# Altium PCB PCB1.PcbDoc
Units mil, origin at the board's own origin, x right, y up, seen from the top; angles counter-clockwise.
Board outline 1140.51 x 1430.51 mil, 2 copper layers (Top Layer, Bottom Layer); 20 components, 9 nets, 52 pads, 1 vias.
Unrouted connection lines stored in the file: 1.
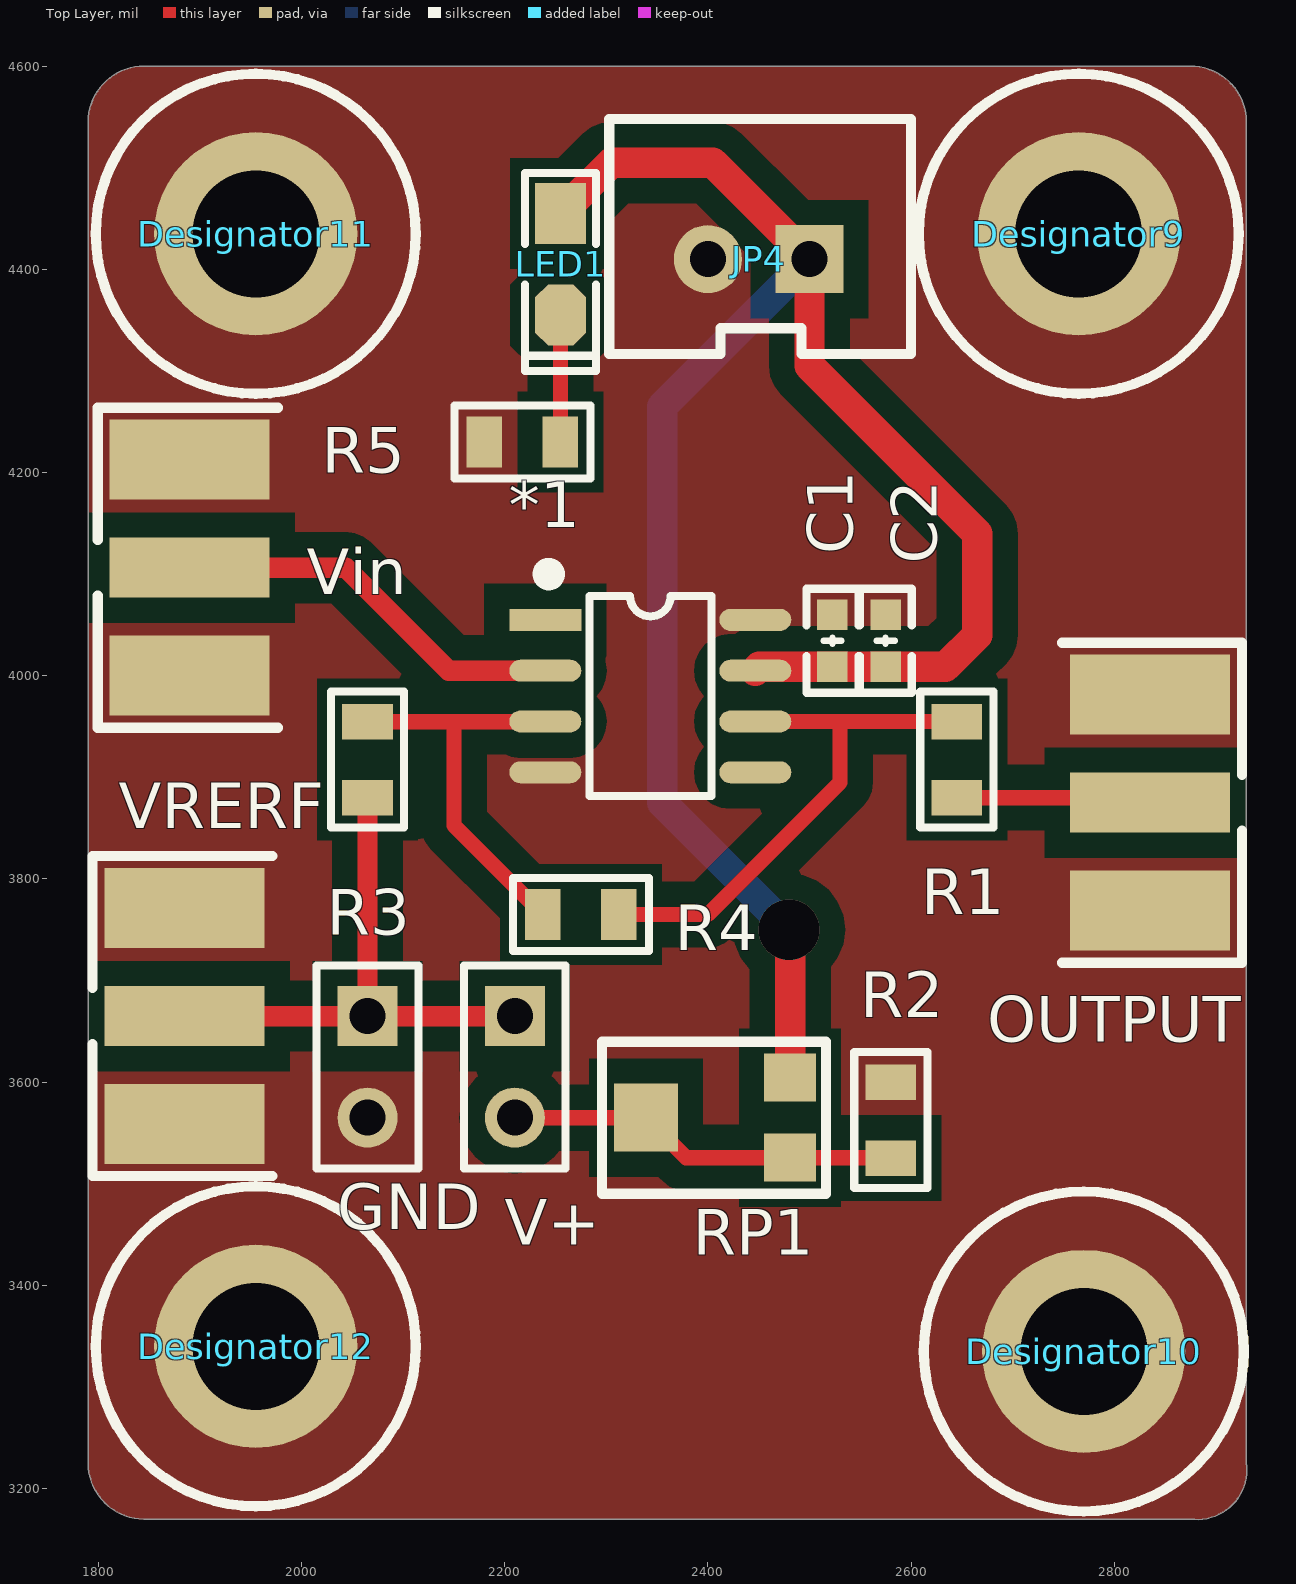
[diagram p0: Top Layer view]
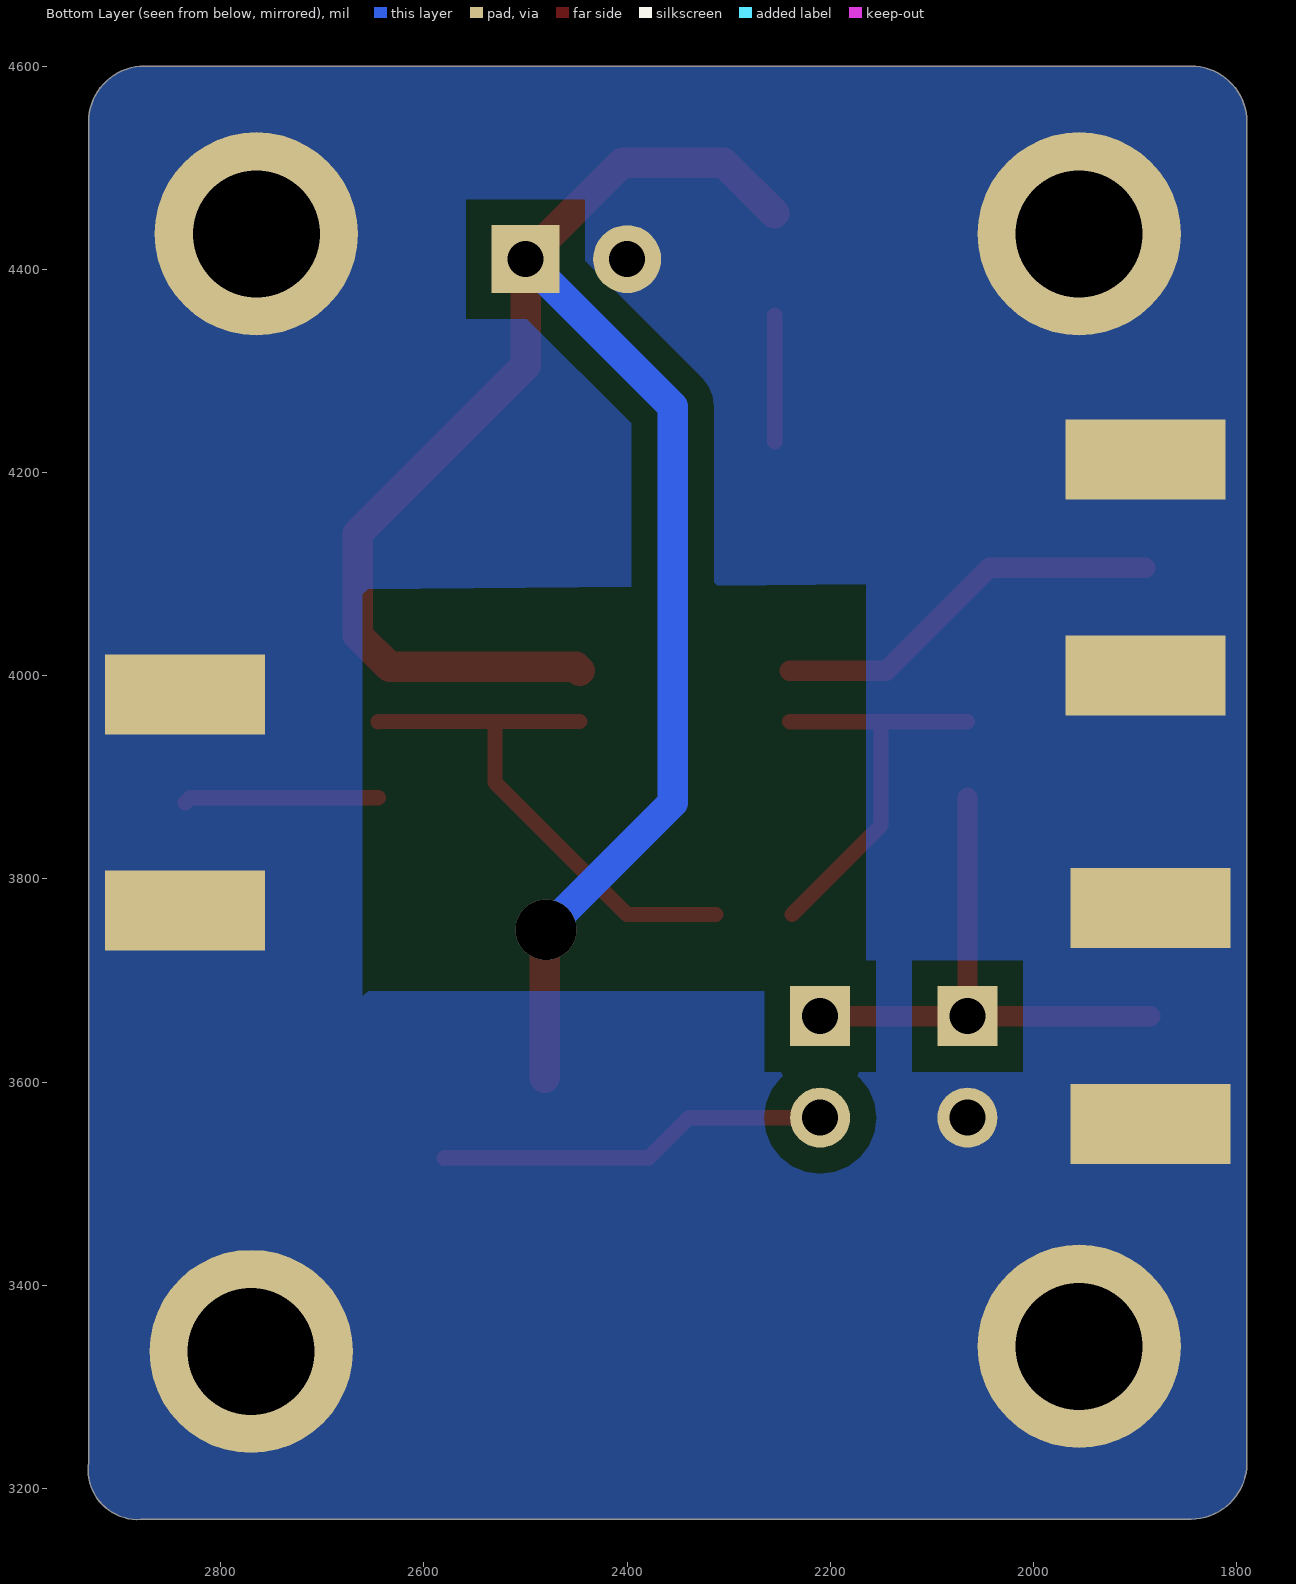
[diagram p1: Bottom Layer view, seen from below]
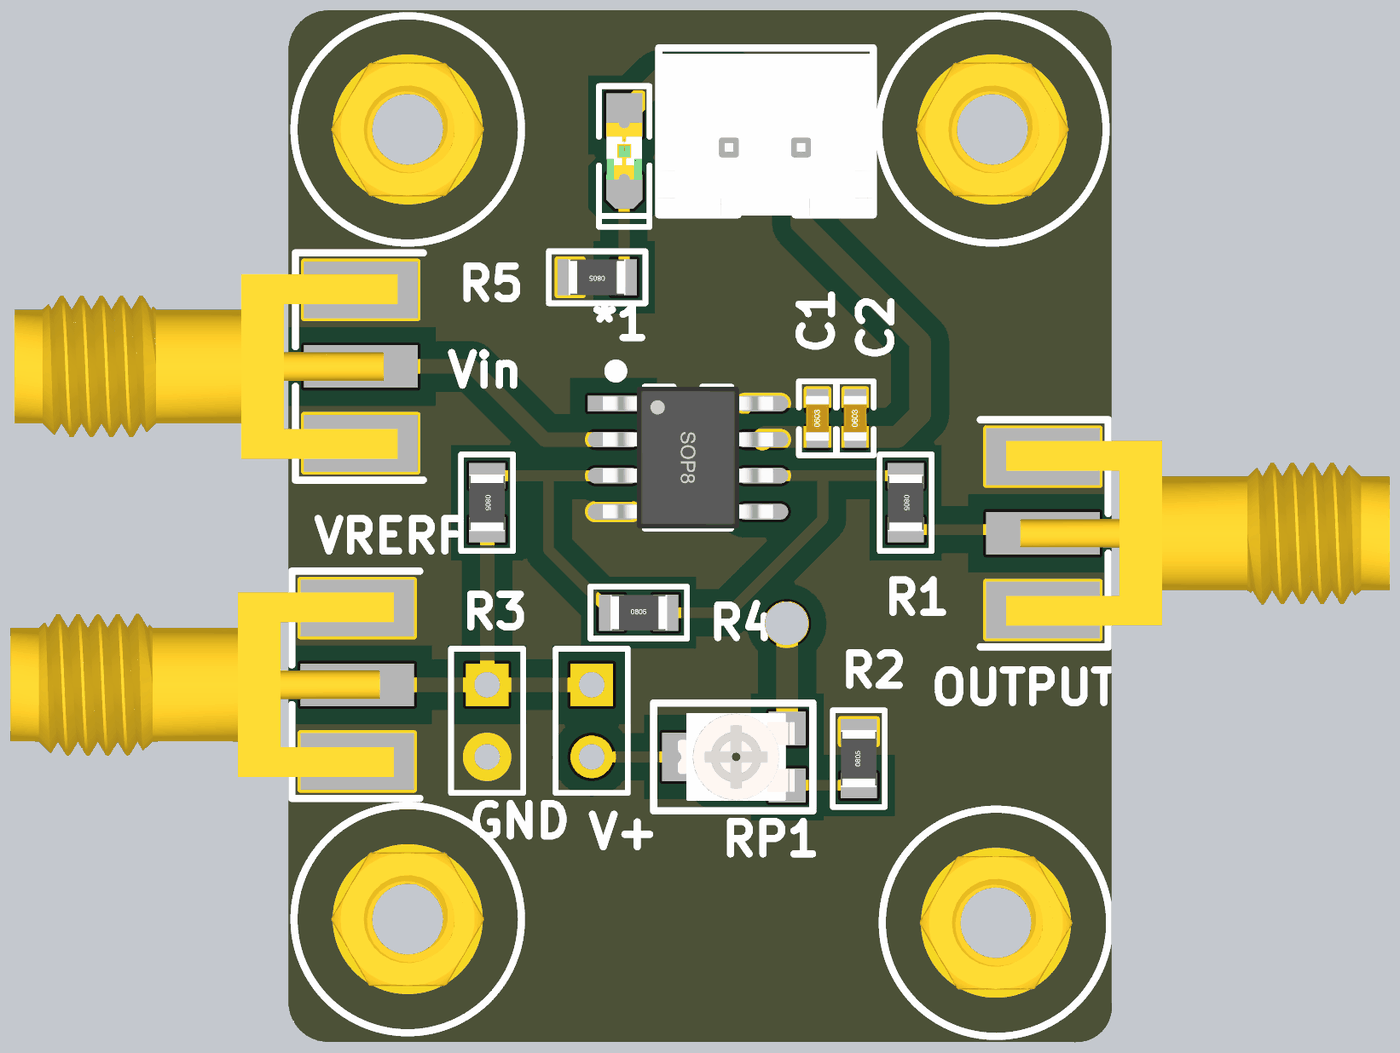
[diagram p2: 3D render of the assembled board from above, using the file's embedded part models]

## Layer stack, top to bottom
Top Solder: solder mask 0.4, Solder Resist, Dk 3.5
Top Layer: signal copper 1.4
Dielectric 1: dielectric 12.6, FR-4, Dk 4.8
Bottom Layer: signal copper 1.4
Bottom Solder: solder mask 0.4, Solder Resist, Dk 3.5

## Board outline
1844.97,3169.99 cw(c1845,3225) 1789.98,3225 1789.98,4545 cw(c1845,4545) 1845,4600.02 2875,4600.02 cw(c2875,4545) 2930.01,4545 2930.01,3225.36 cw(c2881.5,3218.5) 2930.5,3218.5 cw(c2881.5,3218.5) 2874.64,3169.98 1845,3169.98 cw(c1845,3175)

## Design rules (kind name [scope] priority, off if disabled: settings)
Clearance [All] p1: gap=10 ignorepadtopadclearanceinfootprint=FALSE except(0: Arc-Hole Track-Hole SMDPad-Hole THPad-Hole Via-Hole Fill-Hole Poly-Hole Region-Hole Text-Hole; 25: Arc-Fill Arc-Poly Arc-Region Track-Fill Track-Poly Track-Region SMDPad-Fill SMDPad-Poly SMDPad-Region THPad-Fill THPad-Poly THPad-Region Via-Fill Via-Poly Via-Region Fill-Fill Fill-Poly Fill-Region Poly-Poly Poly-Region Region-Region)
PolygonConnect [All] p1: connectstyle=Direct reliefconductorwidth=10 reliefentries=4 polygonreliefangle="90 Angle" airgapwidth=10
RoutingVias [All] p1: holewidth=118.11 width=196.85 viastyle="Through Hole" minholewidth=118.11 minwidth=196.85 maxholewidth=118.11 maxwidth=196.85
SolderMaskExpansion [All] p1: expansion=4
Width [All] p1: maxlimit=30 minlimit=10 preferedwidth=30 minimp=50.000000 maximp=50.000000 favimp=50.000000
30 further rules are at their usual default settings.

## Classes and differential pairs
component class Sheet2: *1 C1 C2 GND JP4 LED1 OUTPUT R1 R2 R3 R4 R5 RP1 V+ Vin VRERF

## Components (designator, comment, footprint, x,y, rotation, side; value= is the part's Value field where it differs from the comment)
*1 "Component_1" SOP8_N 2343.35,3980 r0 top
C1 "0.1uf" "C 0603_L" 2522.59,4034.41 r90 top
C2 "0.1uf" "C 0603_L" 2575,4034.41 r90 top
Designator9 "Comment" M3x4_L 2765,4435 r0 top
Designator10 "Comment" M3x4_L 2770,3335 r0 top
Designator11 "Comment" M3x4_L 1955,4435 r0 top
Designator12 "Comment" M3x4_L 1955,3340 r0 top
GND "Header 2" HDR1X2 2065,3665 r270 top (schematic designator P1)
JP4 "HDR-1X2" XH2.54-LI-2P 2450,4410 r180 top
LED1 "红色" "LED 0805R" 2255,4405 r270 top
OUTPUT "SMA WIFI 天线接口" SMA-KE 2835,3875 r270 top (schematic designator JP3)
R1 "10K" "R 0805_L" 2645,3917.4 r270 top
R2 "10K" "R 0805_L" 2580,3562.6 r90 top
R3 "10K" "R 0805_L" 2065,3917.4 r270 top
R4 "10K" "R 0805_L" 2275,3765 r0 top
R5 "10K" "R 0805_L" 2217.4,4230 r180 top
RP1 "10K" 3303W 2410,3565 r90 top
V+ "Header 2" HDR1X2 2210,3665 r270 top (schematic designator P2)
Vin "SMA WIFI 天线接口" SMA-KE 1890,4106.3 r90 top (schematic designator JP1)
VRERF "SMA WIFI 天线接口" SMA-KE 1885,3665 r90 top (schematic designator JP2)

## Footprints (in the part's own frame and the unit in brackets; to place one, negate y for a bottom-side part, rotate by r counter-clockwise, add the part's x,y. Pads: shape width x height; smd on the part's side, far side on the other; paste and mask are expansions set on the pad)
3303W [mm] "3.5*3.1*1.5mm                          淘宝ID:黄晶宝石"
  rect 1.2x1.3 smd: 1(-1,-1.8) 3(1,-1.8)
  rect 1.7x1.6 smd: 2(0,1.8)
  silkscreen extent -1.9,-2.7 1.9,2.9, body extent -1.55,-2.06 1.55,2.05, height 1.45
"C 0603_L" [mil] "无极性贴片电容                                       淘宝ID:黄晶宝石"
  rect 30x30 smd: 1(-25.59,0) 2(25.59,0)
  silkscreen extent -51,-26 51,26, body extent -31,-16 31,16, height 32
HDR1X2 [mm] "Connector; Header; 2 Position"
  rect 1.5x1.5 hole 0.9: 1(0,0)
  round 1.5 hole 0.9: 2(2.54,0)
  silkscreen extent -1.27,-1.27 3.81,1.27
"LED 0805R" [mil] "红色0805LED                                       淘宝ID:黄晶宝石"
  rect 60x50 smd: 1(-50,0)
  oct 60x50 smd: 2(50,0)
  silkscreen extent -90,-35 105,35, body extent -39,-25 39,25, height 32
M3x4_L [mil] "M3铜柱，长：4mm"
  round 200 hole 125: 1(0,0)
  silkscreen extent -157,-157 157,157, body extent -106,-93 106,93, height 159
"R 0805_L" [mil] "1/8W贴片电阻"
  rect 35x50 smd: 1(-37.4,0) 2(37.4,0)
  silkscreen extent -67,-36 67,36, body extent -39,-25 39,25, height 20
SMA-KE [mm] "SMA 偏脚射频天线座     淘宝ID:黄晶宝石"
  rect 1.5x4 smd: 1(0,0)
  rect 2x4 smd: 2(-2.7,0) 2(2.7,0)
  rect 2x4 smd far side: 3(-2.7,0) 3(2.7,0)
  silkscreen extent -4,-2.2 4,2.3, body extent -3.25,-1.3 3.25,12.2, height 3.75
SOP8_N [mm] "5*6*1.8mm（长宽高）封装库来自淘宝卖家 ID：黄晶宝石"
  rect 1.8x0.55 smd: 1(-2.625,1.905)
  oval 1.8x0.55 smd: 2(-2.625,0.635) 3(-2.625,-0.635) 4(-2.625,-1.905) 5(2.625,-1.905) 6(2.625,-0.635) 7(2.625,0.635) 8(2.625,1.905)
  silkscreen extent -2.69,-2.5 1.52,3.2, body extent -3,-2.5 3,2.5, height 1.9
XH2.54-LI-2P [mm] "接插件，2P  淘宝ID:黄晶宝石   店铺网址:https://shop463601444.taobao.com"
  rect 1.7x1.7 hole 0.9: 1(-1.27,0)
  round 1.7 hole 0.9: 2(1.27,0)
  silkscreen extent -3.81,-3.51 3.74,2.37, body extent -3.77,-3.3 3.77,2.4, height 7.05

## Part data
C1 C2: library part C, "贴片电容"
GND V+: "Header, 2-Pin", LatestRevisionDate=17-Jul-2002, LatestRevisionNote="Re-released for DXP Platform.", Publisher="Altium Limited"
JP4: library part "Header 2", "2P接插件", BOM名称=2P接插件
LED1: library part LED-SMD, "贴片LED", BOM名称=贴片LED, 学习资源=www.ooocke.com, 版权归属=源创客
OUTPUT Vin VRERF: library part SMA, "SMA-2.4G射频天线接口"
R1 R2 R3 R4 R5: library part R, "贴片电阻", BOM名称=贴片电阻, 封装库来自淘宝卖家 ID：黄晶宝石=ÆäËûµêÆÌ¹ºÈë¾ùÎªµÁ°æ£¬²»ÏíÊÜÊÛºó¼, 版权归属="来自淘宝 ID：黄晶宝石", 联系售后=https://shop463601444.taobao.com
RP1: library part RP-ID, "插件单联电位器"

## Via types
v1: diameter 60, hole 60, Top Layer to Bottom Layer, 1 vias

## Nets (pads, with @x,y where several pads share a name; then routed paths per layer and width w, separated by ;. In a path a pad name is that pad's centre, name@x,y a point inside that pad or via, vN(x,y) a via of type N, cw(c..) or ccw(c..) an arc to the next point about the centre after c; other vN are vias at no path point)
+5V: *1.7 C1.1 C2.1 JP4.1 LED1.1 RP1.3 | length 1894
  Top Layer w30: LED1.1 2305,4505 2405,4505 JP4.1 2500,4305 2665,4140 2665,4040 2633.82,4008.82 C2.1 C1.1 2450.51,4008.82 *1.7 ; v1(2480,3750) 2480.87,3749.13 RP1.3
  Bottom Layer w30: v1(2480,3750) 2355,3875 2355,4265 JP4.1
+IN: GND.1 R3.2 V+.1 VRERF.1 | length 540
  Top Layer w20: VRERF.1 GND.1 ; R3.2 GND.1 ; V+.1 GND.1
-IN: *1.2 Vin.1 | length 392
  Top Layer w20: Vin.1 2043.7,4106.3 2145,4005 *1.2
GND: *1.4 *1.8 C1.2 C2.2 Designator9.1 Designator10.1 Designator11.1 Designator12.1 GND.2 JP4.2 OUTPUT.2 OUTPUT.3 R2.2 R5.2 Vin.2 Vin.3 VRERF.2 VRERF.3
Net*1_3: *1.3 R3.1 R4.1 | length 401.2
  Top Layer w15: R3.1 2150,3954.8 ; R4.1 2150,3852.59 2150,3954.8 ; *1.3 2239.8,3954.8 2150,3954.8
Net*1_6: *1.6 R1.1 R4.2 | length 529.8
  Top Layer w15: R4.2 2400,3765 2530,3895 2530,3955 ; *1.6 2530,3955 ; R1.1 2644.8,3955 2530,3955
NetLED1_2: LED1.2 R5.1 | length 125.1
  Top Layer w15: R5.1 2254.8,4354.8 LED1.2
OUTPUT: OUTPUT.1 R1.2 | length 192.1
  Top Layer w15: R1.2 2830,3880 OUTPUT.1
V: R2.1 RP1.1 RP1.2 V+.2 | length 386.5
  Top Layer w15: V+.2 RP1.2 2378.5,3525.63 RP1.1 2579.57,3525.63 R2.1
pads on no net: *1.1 *1.5

## Polygon pours and split planes (outlines as drawn)
GND on Bottom Layer "Top Layer-No Net1" (solid, pour order 4): 1844.97,3169.99 cw(c1845,3225) 1789.98,3225 1789.98,4545 cw(c1845,4545) 1845,4600.02 2875,4600.02 cw(c2875,4545) 2930.01,4545 2930.01,3225.36 cw(c2881.5,3218.5) 2930.5,3218.5 cw(c2881.5,3218.5) 2874.64,3169.98 1845,3169.98 cw(c1845,3175)
GND on Top Layer "Top Layer-No Net" (solid, pour order 5): 1844.97,3169.99 cw(c1845,3225) 1789.98,3225 1789.98,4545 cw(c1845,4545) 1845,4600.02 2875,4600.02 cw(c2875,4545) 2930.01,4545 2930.01,3225.36 cw(c2881.5,3218.5) 2930.5,3218.5 cw(c2881.5,3218.5) 2874.64,3169.98 1845,3169.98 cw(c1845,3175)

## Other copper
Bottom Layer:
  pour cut-out: 2165,4090 2165,3690 2655,3690 2660,3685 2660,4080 2655,4085
  pour cut-out: 2085,4205

## Silkscreen, mask and mechanical layers (free items; w line width, h text height)
Mechanical 1:
  lines w10: 2875,3175 ccw(c2881.5,3218.5) 2925,3225 2925,4545 ccw(c2875,4545) 2875,4595 2135,4595 1845,4595 ccw(c1845,4545) 1795,4545 1795,3705 1795,3225 ccw(c1845,3225) 1845,3175 2885,3175